# Altium PCB PCB2.PcbDoc
Units mm, origin at the board's own origin, x right, y up, seen from the top; angles counter-clockwise.
Board outline 31.24 x 60.01 mm, 2 copper layers (Top Layer, Bottom Layer); 24 components, 28 nets, 96 pads, 21 vias.
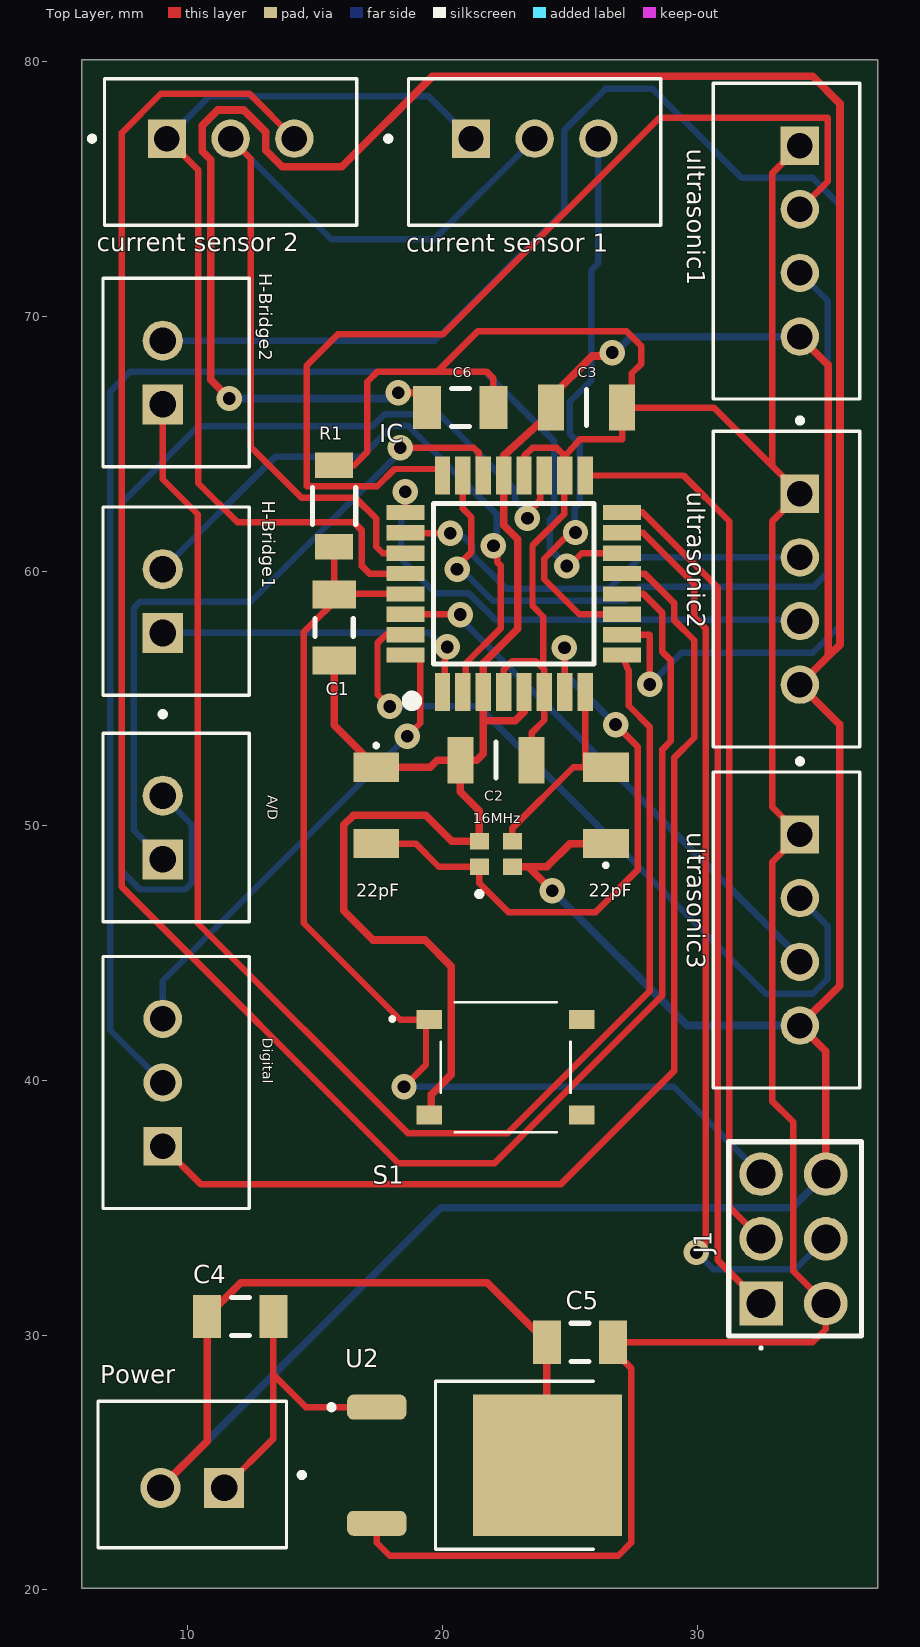
[diagram p0: Top Layer view]
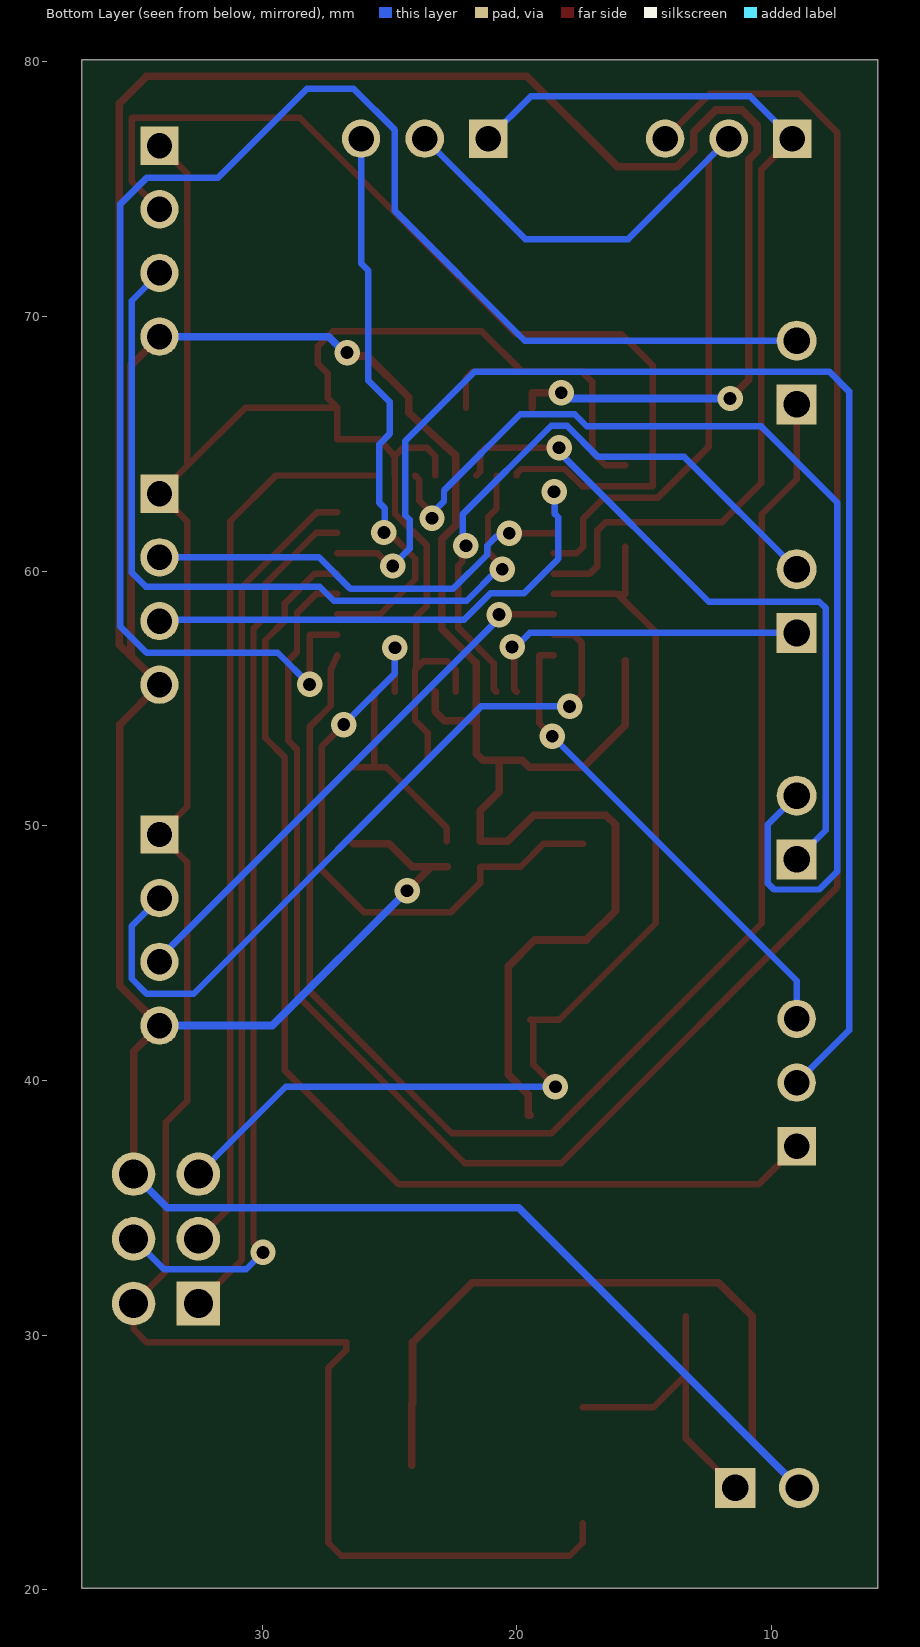
[diagram p1: Bottom Layer view, seen from below]
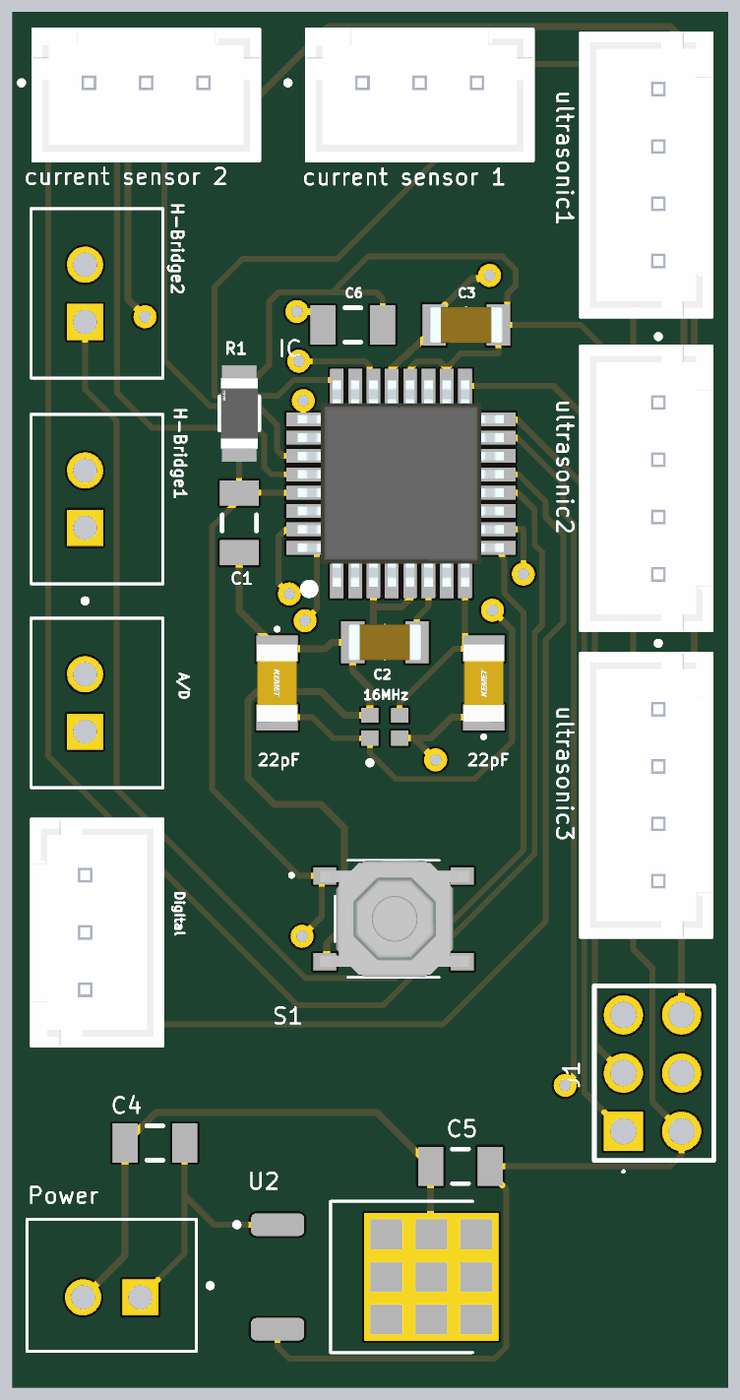
[diagram p2: 3D render of the assembled board from above, using the file's embedded part models]

## Layer stack, top to bottom
Top Solder: solder mask 0.0102, Solder Resist, Dk 3.5
Top Layer: signal copper 0.0356
Dielectric 1: dielectric 0.32, FR-4, Dk 4.8
Bottom Layer: signal copper 0.0356
Bottom Solder: solder mask 0.0102, Solder Resist, Dk 3.5

## Board outline
5.842,20.066 37.084,20.066 37.084,80.073 5.842,80.073

## Design rules (kind name [scope] priority, off if disabled: settings)
BoardOutlineClearance [All] p1: gap=0.2 ignorepadtopadclearanceinfootprint=FALSE except(0.4: Arc-SplitBarrior Arc-SplitContinuation Track-SplitBarrior Track-SplitContinuation SMDPad-SplitBarrior SMDPad-SplitContinuation THPad-SplitBarrior THPad-SplitContinuation Via-SplitBarrior Via-SplitContinuation Fill-SplitBarrior Fill-SplitContinuation Poly-SplitBarrior Poly-SplitContinuation Region-SplitBarrior Region-SplitContinuation Text-SplitBarrior Text-SplitContinuation)
Clearance "Clearance Bottom Layer" [OnLayer('Bottom Layer')] p1: gap=0.203 ignorepadtopadclearanceinfootprint=TRUE except(0.254: Arc-Text Track-Text SMDPad-Text THPad-Text Via-Text Fill-Text Poly-Text Region-Text Text-Text)
Clearance "Clearance Top Layer" [OnLayer('Top Layer')] p2: gap=0.203 ignorepadtopadclearanceinfootprint=TRUE except(0.254: Arc-Text Track-Text SMDPad-Text THPad-Text Via-Text Fill-Text Poly-Text Region-Text Text-Text)
Clearance [All] p3: gap=0.2 ignorepadtopadclearanceinfootprint=FALSE except(0.089: Arc-Arc Arc-Track Arc-SMDPad Track-Track Track-SMDPad SMDPad-SMDPad; 0.127: Arc-Via Track-Via SMDPad-Via THPad-Via Via-Via; 0.254: Arc-Text Track-Text SMDPad-Text THPad-Text Via-Text Fill-Text Poly-Text Region-Text Text-Text)
HoleSize [All] p1: absolutevalues=TRUE maxlimit=6.3 minlimit=0.2 maxpercent=80.000 minpercent=20.000
MinimumAnnularRing [All] p1: minimumring=0.076
MinimumSolderMaskSliver [All] p1: minsoldermaskwidth=0.1
PolygonConnect PolygonConnect_1 [All] p1: thpad.connectstyle=Relief thpad.reliefconductorwidth=0.508 thpad.reliefentries=4 thpad.polygonreliefangle="90 Angle" thpad.airgapwidth=0.254 smdpad.connectstyle=Relief smdpad.reliefconductorwidth=0.508 smdpad.reliefentries=4 smdpad.polygonreliefangle="90 Angle" smdpad.airgapwidth=0.254 via.connectstyle=Direct via.reliefconductorwidth=0.508 via.reliefentries=4 via.polygonreliefangle="90 Angle" via.airgapwidth=0.254
RoutingCorners [All] p1: cornerstyle=Round minsetback=2.54 maxsetback=2.54
RoutingVias [All] p1: holewidth=0.5 width=1 viastyle="Through Hole" minholewidth=0.2 minwidth=0.45 maxholewidth=1 maxwidth=2
SilkToSilkClearance [All] p1: silktosilkclearance=0.1
SilkToSolderMaskClearance [IsPad] p1: minsilkscreentomaskgap=0.1 clearancetoexposedcopper=TRUE
SolderMaskExpansion [All] p1: expansion=0.102 istentingtop=FALSE
Width 5V [InNet('+5')] p1: maxlimit=0.254 minlimit=0.254 preferedwidth=0.254
Width GND [InNet('GND')] p2: maxlimit=0.3 minlimit=0.254 preferedwidth=0.3
Width [All] p3: maxlimit=0.254 minlimit=0.254 preferedwidth=0.254
25 further rules are at their usual default settings.

## Classes and differential pairs
component class Inputs: A/D "current sensor 1" "current sensor 2" Digital H-Bridge1 H-Bridge2 Power ultrasonic1 ultrasonic2 ultrasonic3
component class PowerSupply: C4 C5 U2
component class Main: 16MHz 22pF C1 C2 C3 C6 IC IC1 R1 S1

## Components (designator, comment, footprint, x,y, rotation, side; value= is the part's Value field where it differs from the comment)
16MHz "ABM11-16.000MHz-12-N1G-T" XTAL_ABM11-16.000MHz-12-N1G-T 22.098,48.895 r90 top
22pF "C1206C220JGGACTU" C1206 26.416,50.8 r90 top (schematic designator 22pF(2))
22pF "C1206C220JGGACTU" C1206 17.399,50.8 r270 top (schematic designator 22pF(1))
A/D "B2B-XH-A" JST_B2B-XH-A 9.542,49.931 r270 top
C1 "1206GC102KAT1A" AVX-1206-2_L 15.748,57.785 r90 top
C2 "10nF" CAPC3216X94N 22.101,52.578 r0 top
C3 "10nF" CAPC3216X94N 25.654,66.421 r0 top
C4 "1206GC102KAT1A" AVX-1206-2_L 12.065,30.734 r0 top
C5 "1206GC102KAT1A" AVX-1206-2_L 25.4,29.718 r180 top
C6 "1206GC102KAT1A" AVX-1206-2_L 20.701,66.421 r0 top
"current sensor 1" "B3B-XH-A(LF)(SN)" JST_B3B-XH-A(LF)(SN) 23.622,76.454 r180 top
"current sensor 2" "B3B-XH-A(LF)(SN)" JST_B3B-XH-A(LF)(SN) 11.684,76.454 r180 top
Digital "B3B-XH-A(LF)(SN)" JST_B3B-XH-A(LF)(SN) 9.542,39.918 r270 top (schematic designator D)
H-Bridge1 "B2B-XH-A" JST_B2B-XH-A 9.542,58.821 r270 top
H-Bridge2 "B2B-XH-A" JST_B2B-XH-A 9.542,67.798 r270 top
IC "ATMEGA328P-AU" QFP80P900X900X120-32N 22.803,59.504 r90 top
J1 "87911-0611" 879110611 32.512,31.242 r90 top
Power "B2B-XH-A" JST_B2B-XH-A 10.18,24.528 r0 top
R1 "10k" FP-RC1206-MFG 15.748,62.56 r90 top value=0Ω
S1 "TS-1187A-B-A-B" TS1187ABAB 22.479,40.513 r0 top
U2 "L78M05ACDT-TR" DPAK228P972X240-4N 21.66,24.892 r270 top
ultrasonic1 "B4B-XH-A(LF)(SN)" JST_B4B-XH-A(LF)(SN) 33.511,72.958 r90 top
ultrasonic2 "B4B-XH-A(LF)(SN)" JST_B4B-XH-A(LF)(SN) 33.511,59.289 r90 top
ultrasonic3 "B4B-XH-A(LF)(SN)" JST_B4B-XH-A(LF)(SN) 33.511,45.907 r90 top

## Footprints (in the part's own frame and the unit in brackets; to place one, negate y for a bottom-side part, rotate by r counter-clockwise, add the part's x,y. Pads: shape width x height; smd on the part's side, far side on the other; paste and mask are expansions set on the pad)
879110611 [mm]
  rect 1.71x1.71 hole 1.14: 1(0,0)
  round 1.71 hole 1.14: 2(0,-2.54) 3(2.54,0) 4(2.54,-2.54) 5(5.08,0) 6(5.08,-2.54)
  silkscreen extent -1.8,-3.94 6.35,1.27, body extent -1.4,-3.56 6.22,1.01, height 0.25
AVX-1206-2_L [mm] "SMD, 2-Leads, Body 3.4x1.8mm, IPC High Density"
  rect 1.1x1.7 smd: 1(-1.3,0) 2(1.3,0)
  silkscreen extent -0.35,-0.75 0.35,0.75, body extent -1.7,-0.9 1.7,0.9, height 1.52
C1206 [mm]
  rect 1.15x1.8 smd: 1(-1.5,0) 2(1.5,0)
  silkscreen extent -2.4,-0.05 -2.3,0.05, body extent -1.7,-0.9 1.7,0.9, height 1.1
CAPC3216X94N [mm]
  rect 1.02x1.82 smd: 1(-1.4,0) 2(1.4,0)
  silkscreen extent 0,-0.7 0,0.7, body extent -1.6,-0.8 1.6,0.8, height 0.94
DPAK228P972X240-4N [mm]
  rrect50% 0.98x2.33 smd: 1(-2.28,-4.24) 3(2.28,-4.24)
  rect 5.57x5.86 smd paste-4: 2(0,2.47)
  silkscreen extent -3.3,-6.12 3.3,4.27
FP-RC1206-MFG [mm]
  rect 1x1.5 smd paste+0 mask+0: 1(-1.6,0) 2(1.6,0)
  silkscreen extent -0.73,-0.85 0.73,0.85, body extent -2.2,-0.95 2.2,0.95, height 0.25
JST_B2B-XH-A [mm]
  rect 1.575x1.575 / inner round 1.575 / far side rect 1.575x1.575 hole 1.05: 1(1.25,-0.525)
  round 1.575 hole 1.05: 2(-1.25,-0.525)
  silkscreen extent -3.7,-2.88 3.7,2.87
JST_B3B-XH-A(LF)(SN) [mm]
  rect 1.508x1.508 / inner round 1.508 / far side rect 1.508x1.508 hole 1: 1(2.5,-0.525)
  round 1.508 hole 1: 2(0,-0.525) 3(-2.5,-0.525)
  silkscreen extent -4.95,-2.88 5.85,2.87, body extent -4.95,-2.88 4.95,2.88, height 7
JST_B4B-XH-A(LF)(SN) [mm]
  rect 1.508x1.508 / inner round 1.508 / far side rect 1.508x1.508 hole 1: 1(3.75,-0.525)
  round 1.508 hole 1: 2(1.25,-0.525) 3(-1.25,-0.525) 4(-3.75,-0.525)
  silkscreen extent -6.2,-2.88 6.2,2.87, body extent -6.2,-2.88 6.2,2.88, height 7
QFP80P900X900X120-32N [mm]
  rect 1.5x0.6 smd: 1(-4.25,2.8) 2(-4.25,2) 3(-4.25,1.2) 4(-4.25,0.4) 5(-4.25,-0.4) 6(-4.25,-1.2) 7(-4.25,-2) 8(-4.25,-2.8) 17(4.25,-2.8) 18(4.25,-2) 19(4.25,-1.2) 20(4.25,-0.4) 21(4.25,0.4) 22(4.25,1.2) 23(4.25,2) 24(4.25,2.8)
  rect 0.6x1.5 smd: 9(-2.8,-4.25) 10(-2,-4.25) 11(-1.2,-4.25) 12(-0.4,-4.25) 13(0.4,-4.25) 14(1.2,-4.25) 15(2,-4.25) 16(2.8,-4.25) 25(2.8,4.25) 26(2,4.25) 27(1.2,4.25) 28(0.4,4.25) 29(-0.4,4.25) 30(-1.2,4.25) 31(-2,4.25) 32(-2.8,4.25)
  silkscreen extent -4.8,-3.15 3.15,4.2, body extent -4.5,-4.5 4.5,4.5, height 1.2
TS1187ABAB [mm]
  rect 1x0.75 smd: A1(-3,1.875) B1(3,1.875) C1(-3,-1.875) D1(3,-1.875)
  silkscreen extent -4.5,-2.55 2.55,2.55, body extent -3.2,-2.55 3.3,2.55, height 1.5
XTAL_ABM11-16.000MHz-12-N1G-T [mm]
  rect 0.65x0.75 smd: 1(-0.5,0.65) 2(-0.5,-0.65) 3(0.5,-0.65) 4(0.5,0.65)
  silkscreen extent -1.67,0.55 -1.48,0.75

## Part data
16MHz A/D H-Bridge1 H-Bridge2 Power: Package=None, Availability=Unavailable, Price=None
  16MHz: MF="{'manufacturer': u'Abracon LLC'}", MP=ABM11-16.000MHz-12-N1G-T
  A/D H-Bridge1 H-Bridge2 Power: MF="{'manufacturer': u'JST Sales America Inc.'}", MP=B2B-XH-A
22pF 22pF: "Capacitor", Manufacturer_Name=KEMET, Mouser Part Number=80-C1206C220JGG, Datasheet Link=https://content.kemet.com/datasheets/KEM_C1009_C0G_HV_SMD.pdf, Manufacturer_Part_Number=C1206C220JGGACTU, Mouser Price/Stock=https://www.mouser.co.uk/ProductDetail/KEMET/C1206C220JGGACTU?qs=bISZhnDGhxtrVzrFMq60vg%3D%3D
C1 C6: library part CMP-2000-05468-1, "Chip Capacitor, 1 nF, +/- 10%, -55 to 125 degC, 1206 (3216 Metric), RoHS, Tape and Reel", Capacitance=100nF, Case Size/Dimension=1206, Dielectric=X7R, Manufacturer=AVX, Package Description="2-Pin SMD, Body 3.4 x 1.8 mm", Rated Voltage=2000V, Tolerance=10%, Tolerance (%)=±10%, Datasheet URL=https://datasheet.ciiva.com/11787/0900766b80ed4c37-11787781.pdf, Datasheet Version=11/2010, Manufacturer URL=http://www.avx.com/, Mounting Technology=SurfaceMount, Package Reference=1206, PartNumber=1206GC102KAT1A, Voltage Rating DC=2000V
C2 C3: library part KAM31BR81H103KT, "Capacitor", Manufacturer_Name="Kyocera AVX", Mouser Part Number=581-KAM31BR81H103KT, Datasheet Link=https://datasheets.kyocera-avx.com/AutoMLCCKAM.pdf, Height=0.94mm, Manufacturer_Part_Number=KAM31BR81H103KT, Mouser Price/Stock=https://www.mouser.co.uk/ProductDetail/KYOCERA-AVX/KAM31BR81H103KT?qs=Jm2GQyTW%2FbjzijSUJGW%2FJA%3D%3D
C4 C5: library part CMP-2000-05468-1, "Chip Capacitor, 1 nF, +/- 10%, -55 to 125 degC, 1206 (3216 Metric), RoHS, Tape and Reel", Capacitance=0.001uF, Case Size/Dimension=1206, Dielectric=X7R, Manufacturer=AVX, Package Description="2-Pin SMD, Body 3.4 x 1.8 mm", Rated Voltage=2000V, Tolerance=10%, Tolerance (%)=±10%, Datasheet URL=https://datasheet.ciiva.com/11787/0900766b80ed4c37-11787781.pdf, Datasheet Version=11/2010, Manufacturer URL=http://www.avx.com/, Mounting Technology=SurfaceMount, Package Reference=1206, PartNumber=1206GC102KAT1A, Voltage Rating DC=2000V
"current sensor 1" "current sensor 2" Digital: "Connector Header Through Hole 3 position 0.098 (2.50mm)", Package=None, Check_prices=https://www.snapeda.com/parts/B3B-XH-A(LF)(SN)/JST+Sales+America+Inc./view-part/?ref=eda, MF="JST Sales", MP=B3B-XH-A(LF)(SN), SnapEDA_Link=https://www.snapeda.com/parts/B3B-XH-A(LF)(SN)/JST+Sales+America+Inc./view-part/?ref=snap
IC: "Integrated Circuit", Manufacturer_Name=Microchip, Mouser Part Number=556-ATMEGA328P-AU, Arrow Part Number=ATMEGA328P-AU, Arrow Price/Stock=https://www.arrow.com/en/products/atmega328p-au/microchip-technology?region=europe, Datasheet Link=https://componentsearchengine.com/Datasheets/2/ATMEGA328P-AU.pdf, Height=1.2mm, Manufacturer_Part_Number=ATMEGA328P-AU, Mouser Price/Stock=https://www.mouser.co.uk/ProductDetail/Microchip-Technology/ATMEGA328P-AU?qs=K8BHR703ZXiCmmgp6%2FGNmQ%3D%3D
J1: "Connector", Manufacturer_Name=Molex, Mouser Part Number=538-87911-0611, Datasheet Link=https://www.molex.com/content/dam/molex/molex-dot-com/products/automated/en-us/salesdrawingpdf/879/87911/879110611_sd.pdf, Height=5.18mm, Manufacturer_Part_Number=87911-0611, Mouser Price/Stock=https://www.mouser.co.uk/ProductDetail/Molex/87911-0611?qs=vTUKd8r8%252BfEYOBWrgoJ4qQ%3D%3D
R1: library part CMP-2100-03681-2, "RES SMD 0 OHM JUMPER 1/4W 1206", Manufacturer=YAGEO, Manufacturer Part Number=RC1206JR-070RL, Package=RC1206, Power Rating=0.25W, Resistance=0Ω, Temperature="-55°C to +155°C", Temperature Coefficient=300ppm/°C, Temperature Range High=+155°C, Temperature Range Low=-55°C, Tolerance=5%, Voltage Rating=200V, Automotive=No, Category=Res, ComponentLink2Description=Datasheet, ComponentLink2URL=https://www.yageo.com/upload/media/product/productsearch/datasheet/rchip/PYu-RC_Group_51_RoHS_L_10.pdf, Composition="Thick Film", Device Class L1="Passive Components", Device Class L2=Resistors, Device Class L3="Chip SMD Resistors", Digikey Description="RES SMD 0 OHM JUMPER 1/4W 1206", Footprint Url=https://www.yageo.com/upload/website/yageo_PYu-R_Mount_10_19050818_343.pdf, Height=0.65mm, Ipc Land Pattern Name=RESC310160X55, Lead Free=Yes, Mouser Description="Resistor: thick film; SMD; 1206; 0O; 0.25W; ±5%; -55÷155°C", Octopart=https://octopart.com/rc1206jr-070rl-yageo-40025601, RoHS=TRUE, Series=RC
S1: "Switch", Manufacturer_Name="XKB Connectivity", Datasheet Link=http://www.helloxkb.com/public/images/pdf/TS-1187A-X-X-X.pdf, Height=4.05mm, Manufacturer_Part_Number=TS-1187A-B-A-B
U2: "Linear Voltage Regulator IC 1 Output 500mA DPAK", Package="TO-252-3 STMicroelectronics", Availability=Unavailable, MF=STMicroelectronics, MP=L78M05ACDT-TR, Price=None, SnapEDA_Link=https://www.snapeda.com/parts/L78M05ACDT-TR/STMicroelectronics/view-part/274303/?ref=snap
ultrasonic1 ultrasonic2 ultrasonic3: "Connector Header Through Hole 4 position 0.098 (2.50mm)", Package=None, Check_prices=https://www.snapeda.com/parts/B4B-XH-A(LF)(SN)/JST+Sales+America+Inc./view-part/?ref=eda, MF="JST Sales", MP=B4B-XH-A(LF)(SN), SnapEDA_Link=https://www.snapeda.com/parts/B4B-XH-A(LF)(SN)/JST+Sales+America+Inc./view-part/?ref=snap

## Via types
v1: diameter 1, hole 0.5, Top Layer to Bottom Layer, 21 vias

## Nets (pads, with @x,y where several pads share a name; then routed paths per layer and width w, separated by ;. In a path a pad name is that pad's centre, name@x,y a point inside that pad or via, vN(x,y) a via of type N, cw(c..) or ccw(c..) an arc to the next point about the centre after c; other vN are vias at no path point)
+5: C2.2 C3.2 C5.1 C6.2 IC.4 IC.6 IC.18 IC.20 J1.2 R1.2 U2.3 ultrasonic1.1 ultrasonic2.1 ultrasonic3.1 | length 128.6
  Top Layer w0.254: R1.2 16.535,64.16 17.052,64.677 17.052,67.439 17.448,67.835 19.804,67.835 ; U2.3 17.42,21.844 17.928,21.336 26.899,21.336 27.407,21.844 27.407,28.707 26.7,29.413 C5.1 34.544,29.718 35.052,30.226 J1.2 33.782,32.512 33.782,38.354 32.944,39.192 32.944,48.565 ultrasonic3.1 32.944,50.749 32.944,61.947 ultrasonic2.1 32.944,64.131 ; C6.2 22.001,67.564 21.73,67.835 19.804,67.835 ; IC.4 22.403,56.134 22.733,56.464 23.673,56.464 24.003,56.134 IC.6 24.003,54.147 23.501,53.645 C2.2 ; IC.20 23.203,64.516 23.521,64.834 24.485,64.834 24.803,64.516 ; 23.96,56.177 23.96,58.213 23.536,58.636 23.536,61.001 24.789,62.254 24.789,63.74 IC.18 24.803,64.516 ; ultrasonic1.1 32.944,75.616 32.944,64.131 ; 19.804,67.835 21.379,69.41 27.237,69.41 27.813,68.834 27.813,68.14 27.437,67.764 27.437,66.804 C3.2 ; 24.803,64.516 25.4,65.176 27.054,65.176 C3.2 ; C3.2 30.654,66.421 32.944,64.131
GND: 16MHz.2 16MHz.4 22pF.1 C1.1 C2.1 C3.1 C4.1 C5.2 C6.1 IC.3 IC.5 IC.21 J1.6 Power.2 S1.C1 U2.2 ultrasonic1.4 ultrasonic2.4 ultrasonic3.4 | length 243.6
  Top Layer w0.3: Power.2 10.765,25.838 C4.1 12.086,32.055 21.763,32.055 C5.2 24.1,27.31 24.13,27.28 U2.2 ; v1(11.633,66.777) 10.897,67.513 10.897,76.149 10.566,76.479 10.566,77.495 11.176,78.105 12.192,78.105 13.056,77.241 13.056,76.53 13.716,75.87 16.053,75.87 19.609,79.426 34.544,79.426 35.611,78.359 35.611,57.114 35.154,56.657 ; C1.1 15.748,53.951 17.399,52.3 19.516,52.3 19.794,52.578 C2.1 ; v1(18.263,67.005) 19.401,67.005 C6.1 ; S1.C1 19.558,38.638 19.558,39.446 20.345,40.234 20.345,44.475 19.304,45.517 17.272,45.517 16.129,46.66 16.129,50.038 16.51,50.419 19.347,50.419 20.371,49.395 16MHz.4 21.448,50.597 20.701,51.344 C2.1 ; 16MHz.2 23.368,48.395 ; IC.5 23.203,54.47 22.86,54.127 21.603,54.127 ; v1(24.316,47.447) 23.368,48.395 ; 22pF.1@26.416,49.3 25.01,49.3 24.105,48.395 23.368,48.395 ; v1(26.67,68.58) 26.536,68.446 25.879,68.446 24.254,66.821 24.254,66.218 22.403,64.542 IC.21 22.403,61.797 22.951,61.248 22.951,57.737 21.603,56.389 IC.3 21.603,54.127 ; ultrasonic1.4 35.154,68.09 35.154,56.657 ; J1.6 35.052,41.141 ultrasonic3.4 35.6,43.721 35.6,53.975 ultrasonic2.4 35.154,56.657 ; C2.1 21.349,52.578 21.603,52.832 21.603,54.127
  Bottom Layer w0.3: Power.2 19.928,35.001 33.731,35.001 J1.6 ; v1(11.633,66.777) 18.034,66.777 v1(18.263,67.005) ; v1(24.316,47.447) 29.606,42.157 ultrasonic3.4 ; v1(26.67,68.58) 26.758,68.58 27.386,69.208 ultrasonic1.4
MISO: IC.16 J1.1 | length 33.8
  Top Layer w0.254: IC.16 27.864,62.304 30.802,59.366 30.802,32.952 J1.1
MOSI: IC.15 J1.4 | length 36.1
  Top Layer w0.254: IC.15 27.879,61.504 29.888,59.495 29.888,58.199 30.345,57.742 30.345,33.622 v1(29.972,33.249)
  Bottom Layer w0.254: v1(29.972,33.249) 30.632,32.588 33.858,32.588 J1.4
Net16MHz_1: 16MHz.1 22pF.2@17.399,49.3 IC.7 | length 24.1
  Top Layer w0.254: 22pF.2@17.399,49.3 18.948,49.3 19.853,48.395 16MHz.1 21.448,47.752 22.586,46.614 26.014,46.614 27.661,48.26 27.661,53.111 v1(26.797,53.975) ; v1(24.79,56.985) 24.803,56.972 IC.7
  Bottom Layer w0.254: v1(24.79,56.985) 24.79,55.982 v1(26.797,53.975)
Net16MHz_3: 16MHz.3 22pF.2@26.416,52.3 IC.8 | length 8.1
  Top Layer w0.254: 16MHz.3 22.748,49.911 25.137,52.3 22pF.2@25.603,52.3 ; IC.8 22pF.2@25.603,52.3 ; 22pF.2@26.416,52.3 22pF.2@25.603,52.3
NetA/D_1: A/D.1 IC.22 | length 27.6
  Top Layer w0.254: v1(18.346,64.839) 21.235,64.839 21.433,64.641 21.433,63.924 IC.22
  Bottom Layer w0.254: A/D.1 7.874,49.824 7.874,58.547 8.128,58.801 12.471,58.801 18.346,64.675 v1(18.346,64.839)
NetA/D_2: A/D.2 IC.19 | length 42.9
  Top Layer w0.254: v1(23.336,62.071) 23.336,62.272 23.833,62.77 23.833,63.584 IC.19
  Bottom Layer w0.254: A/D.2 10.16,50.038 10.16,47.752 9.906,47.498 8.128,47.498 7.417,48.209 7.417,62.687 10.414,65.684 17.255,65.684 17.729,66.159 19.871,66.159 22.865,63.165 22.865,62.743 23.336,62.272 v1(23.336,62.071)
NetC4_2: C4.2 Power.1 U2.1 | length 12.1
  Top Layer w0.254: Power.1 13.365,25.938 13.365,28.448 ; C4.2 13.365,28.448 ; U2.1 14.641,27.172 13.365,28.448
"Netcurrent sensor 1_1": "current sensor 1.1" "current sensor 2.1" IC.28 | length 37.8
  Top Layer w0.254: 9.184,76.979 10.414,75.749 10.414,63.449 11.938,61.925 16.51,61.925 16.84,61.595 16.84,60.198 17.134,59.904 IC.28
  Bottom Layer w0.254: 9.184,76.979 10.843,78.638 19.463,78.638 21.122,76.979
"Netcurrent sensor 1_2": "current sensor 1.2" "current sensor 2.2" IC.27 | length 36.1
  Top Layer w0.254: 11.684,76.979 12.476,76.187 12.476,64.875 14.478,62.873 16.59,62.873 17.399,62.064 17.399,60.96 17.655,60.704 IC.27
  Bottom Layer w0.254: 11.684,76.979 15.638,73.025 19.668,73.025 23.622,76.979
"Netcurrent sensor 1_3": "current sensor 1.3" IC.11 | length 22.3
  Top Layer w0.254: v1(25.225,61.516) 25.023,61.516 23.994,60.486 23.994,59.682 25.372,58.304 IC.11
  Bottom Layer w0.254: v1(25.225,61.516) 25.199,61.542 25.199,62.476 25.4,62.677 25.4,64.985 25.002,65.384 25.002,66.646 25.84,67.484 25.84,71.801 26.122,72.083 26.122,76.979
"Netcurrent sensor 2_3": "current sensor 2.3" IC.12 | length 83.4
  Top Layer w0.254: 14.184,76.979 12.423,78.74 8.941,78.74 7.417,77.216 7.417,47.6 18.263,36.754 22.047,36.754 28.637,43.343 28.637,52.999 28.973,53.335 28.973,56.491 28.637,56.827 28.637,58.358 27.891,59.104 IC.12
NetD_1: Digital.1 IC.13 | length 44.1
  Top Layer w0.254: Digital.1 10.519,35.916 24.638,35.916 29.11,40.388 29.11,52.68 29.888,53.457 29.888,57.284 29.11,58.062 29.11,58.729 27.934,59.904 IC.13
NetD_2: Digital.2 IC.14 | length 54.5
  Top Layer w0.254: v1(24.881,60.2) 24.969,60.2 25.474,60.705 27.052,60.705 IC.14
  Bottom Layer w0.254: Digital.2 6.96,41.975 6.96,67.056 7.739,67.835 21.657,67.835 24.384,65.108 24.384,62.191 24.205,62.013 24.205,60.884 24.881,60.209 v1(24.881,60.2)
NetD_3: Digital.3 IC.32 | length 19
  Top Layer w0.254: IC.32 19.126,56.704 19.126,54.026 v1(18.618,53.518)
  Bottom Layer w0.254: Digital.3 9.017,43.917 v1(18.618,53.518)
NetH-Bridge1_1: H-Bridge1.1 IC.1 | length 13.3
  Top Layer w0.254: IC.1 20.098,55.349 20.098,56.928 v1(20.193,57.023)
  Bottom Layer w0.254: H-Bridge1.1 19.495,57.571 20.043,57.023 v1(20.193,57.023)
NetH-Bridge1_2: H-Bridge1.2 IC.2 | length 24.7
  Top Layer w0.254: IC.2 20.92,55.371 20.92,56.385 22.297,57.762 22.297,60.206 22.145,60.358 22.145,60.848 v1(22.002,60.991)
  Bottom Layer w0.254: H-Bridge1.2 13.429,64.483 16.815,64.483 18.034,65.702 18.657,65.702 22.137,62.222 22.137,61.126 v1(22.002,60.991)
NetH-Bridge2_1: H-Bridge2.1 IC.9 | length 58
  Top Layer w0.254: H-Bridge2.1 9.017,63.602 10.389,62.23 10.389,46.177 18.644,37.922 22.555,37.922 28.143,43.51 28.143,53.879 27.313,54.709 27.313,56.099 IC.9
NetH-Bridge2_2: H-Bridge2.2 IC.10 | length 62.4
  Top Layer w0.254: IC.10 28.143,57.504 v1(28.143,55.55)
  Bottom Layer w0.254: H-Bridge2.2 19.696,69.048 24.79,74.143 24.79,77.318 26.416,78.943 28.245,78.943 31.75,75.438 34.544,75.438 35.585,74.397 35.585,57.836 34.544,56.794 29.388,56.794 v1(28.143,55.55)
NetIC_23: IC.23 ultrasonic1.3 | length 31.8
  Top Layer w0.254: v1(20.574,60.071) 20.574,60.191 21.137,60.754 21.137,62.116 20.803,62.45 IC.23
  Bottom Layer w0.254: v1(20.574,60.071) 20.744,60.071 21.974,58.841 27.197,58.841 27.741,59.385 34.569,59.385 35.128,59.944 35.128,70.616 ultrasonic1.3
NetIC_24: IC.24 ultrasonic1.2 | length 39
  Top Layer w0.254: IC.24 20.003,63.836 19.83,64.009 18.119,64.009 17.44,63.33 14.668,63.33 14.668,68.072 15.887,69.291 20.015,69.291 28.524,77.8 35.128,77.8 35.128,75.3 ultrasonic1.2
NetIC_25: IC.25 ultrasonic2.3 | length 20.2
  Top Layer w0.254: v1(18.542,63.119) 18.542,62.315 IC.25
  Bottom Layer w0.254: v1(18.542,63.119) 18.507,63.084 18.507,62.238 18.38,62.111 18.38,60.477 19.735,59.123 21.045,59.123 22.071,58.097 33.978,58.097 ultrasonic2.3
NetIC_26: IC.26 ultrasonic2.2 | length 17.1
  Top Layer w0.254: IC.26 18.562,61.495 20.298,61.495 v1(20.307,61.486)
  Bottom Layer w0.254: v1(20.307,61.486) 20.45,61.343 20.826,61.343 21.172,60.997 21.172,60.647 22.521,59.298 26.532,59.298 27.773,60.539 ultrasonic2.2
NetIC_30: IC.30 ultrasonic3.3 | length 21.3
  Top Layer w0.254: IC.30 20.69,58.304 v1(20.701,58.293)
  Bottom Layer w0.254: v1(20.701,58.293) 20.701,58.143 34.036,44.808 ultrasonic3.3
NetIC_31: IC.31 ultrasonic3.2 | length 29.7
  Top Layer w0.254: v1(17.932,54.686) 17.45,55.169 17.45,57.174 17.78,57.504 IC.31
  Bottom Layer w0.254: v1(17.932,54.686) 21.412,54.686 32.69,43.409 34.544,43.409 35.128,43.993 35.128,46.065 ultrasonic3.2
RESET: C1.2 IC.29 J1.5 R1.1 S1.A1 | length 43.2
  Top Layer w0.254: R1.1 C1.2 C1.2@16.053,59.104 ; v1(18.491,39.751) 19.355,40.615 S1.A1@19.355,42.388 ; IC.29 17.139,59.104 C1.2@16.053,59.104 ; S1.A1 S1.A1@19.355,42.388 ; C1.2@16.053,59.104 14.554,57.605 14.554,46.173 18.339,42.388 S1.A1@19.355,42.388
  Bottom Layer w0.254: v1(18.491,39.751) 29.083,39.751 J1.5
SCK: IC.17 J1.3 | length 35.1
  Top Layer w0.254: IC.17 29.464,63.754 31.259,61.959 31.259,35.035 J1.3
pads on no net: S1.B1 S1.D1

## Silkscreen, mask and mechanical layers (free items; w line width, h text height)
Mechanical 1:
  lines w0.254: 5.842,20.066 37.084,20.066 37.084,78.867 37.084,80.01 5.842,80.01 5.842,20.066